# EAGLE board PCBEndCap (EAGLE 8.3.1)
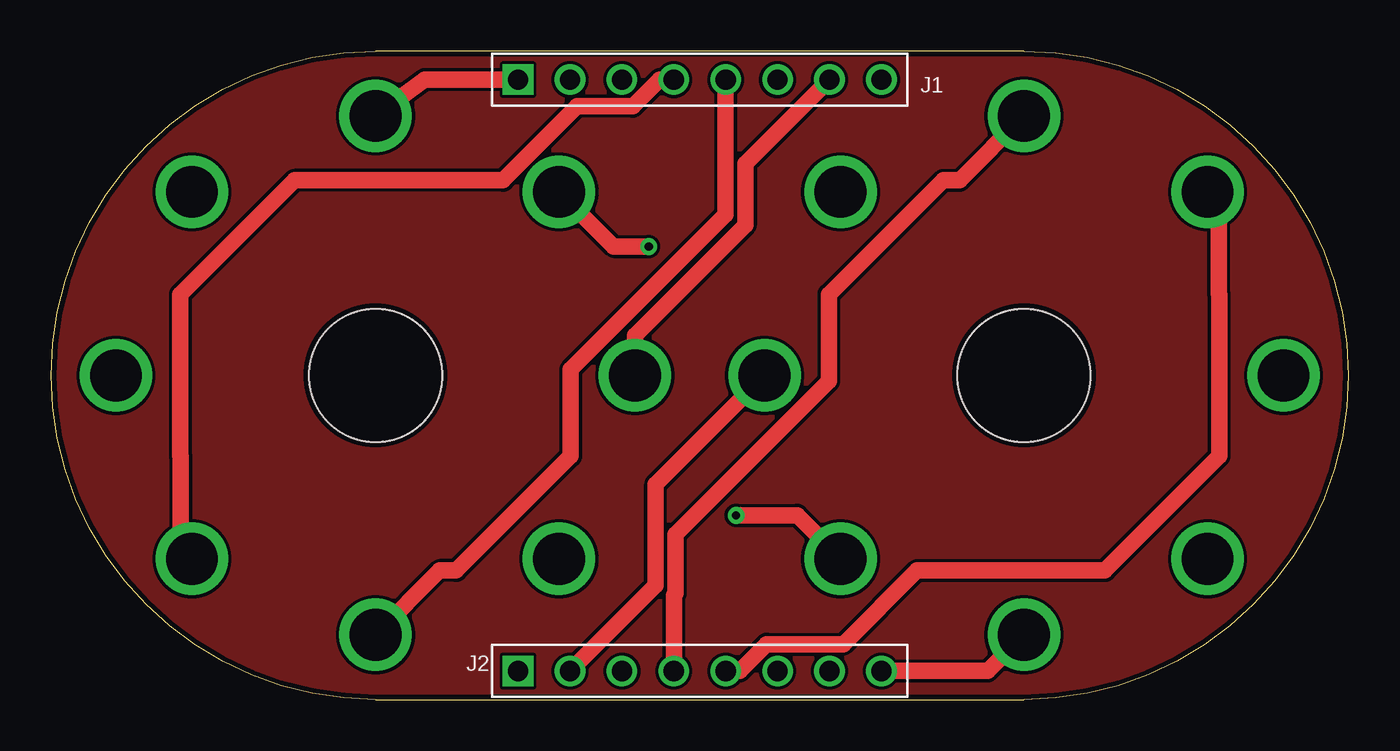
[diagram p0: board, top side]
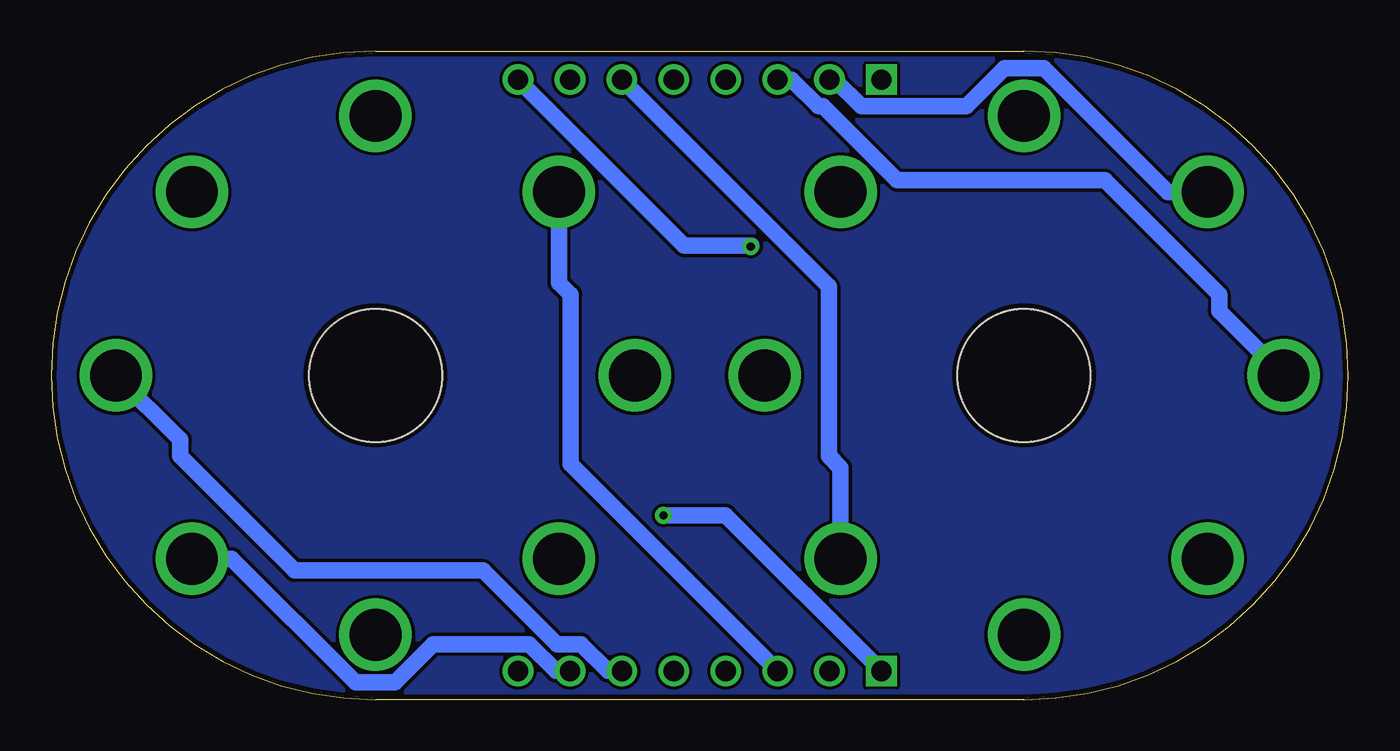
[diagram p1: board, bottom side, seen from below]

Size 63.5 x 31.75 mm. Coordinates in mm from the lower left corner, seen from the top.
Outline: 15.87,0 47.62,0 arc180 47.62,31.75 15.87,31.75 arc180 15.87,0
Copper layers (1*16): Top 0.035mm / dielectric 1.5mm / Bottom 0.035mm
Design rules "default *": minimum track width 6mil, minimum drill 0.35mm, track to track 6mil, track to pad 6mil, pad to pad 6mil, via to via 6mil, smd to smd 6mil, copper to edge 10mil, drill to drill 6mil, minimum pad ring 10mil, minimum via ring 8mil, stop-mask expansion 4mil, vias tented up to drill 0mil, thermal gap 10mil
Holes 6.5 mm at 15.87,15.88 47.62,15.88

## Footprints (pad centres in the part's own frame; a part is rotated, then mirrored left to right if it is on the bottom)
8PIN_.1' = drill 0.991 square: P$1 -8.89,0 | drill 0.991: P$2 -6.35,0; P$3 -3.81,0; P$4 -1.27,0; P$5 1.27,0; P$6 3.81,0; P$7 6.35,0; P$8 8.89,0

## Placement (x,y rotation side)
J1  CONNECTOR_8PIN  [8PIN_.1']  31.75,30.35 0 top
J2  CONNECTOR_8PIN  [8PIN_.1']  31.75,1.4 0 top

## Library data of the parts
J1 J2 = lolomolo

## Nets
N1: J1.P$1
N2: J1.P$2
N3: J1.P$3
N4: J1.P$4
N5: J1.P$5
N6: J1.P$6
N7: J1.P$7
N8: J1.P$8
N9: J2.P$1
N10: J2.P$2
N11: J2.P$3
N12: J2.P$4
N13: J2.P$5
N14: J2.P$6
N15: J2.P$7
N16: J2.P$8

## Tracks (layer width: path | path; a pad name or v marks a point on that pad's centre or on a via)
N1  (via drill 2.54)
  Top 0.813: J1.P$1 18.29,30.35 v15.87,28.57
N2  (via drill 2.54)
  Bottom 0.813: J1.P$2 25.15,30.35 23.84,29.05 18.71,29.05 16.84,30.91 14.91,30.91 8.85,24.86 v6.89,24.86
N3  (via drill 2.54)
  Bottom 0.813: v3.17,15.88 6.32,19.02 6.32,19.83 11.92,25.43 22.1,25.43 25.71,29.05 25.94,29.05 27.25,30.35 J1.P$3
N4  (via drill 2.54)
  Top 0.813: J1.P$4 29.79,30.35 28.48,29.05 25.74,29.05 22.12,25.43 11.92,25.43 6.32,19.83 6.32,11.92 6.35,11.89 6.35,7.44 v6.89,6.89
N5  (via drill 2.54)
  Top 0.813: v15.87,3.17 19.02,6.32 19.83,6.32 25.43,11.92 25.43,16.16 33.02,23.75 J1.P$5
N6  (via drill 2.54)
  Bottom 0.813: v24.85,6.89 24.85,11.35 25.43,11.92 25.43,20.22 J1.P$6
N7  (via drill 2.54)
  Top 0.813: J1.P$7 33.98,26.24 33.98,23.23 28.57,17.82 v28.57,15.88
N8  (via drill 0.41, 2.54)
  Top 0.813: v24.85,24.86 27.53,22.18 v29.26,22.18
  Bottom 0.813: J1.P$8 32.51,22.23 29.21,22.23 v29.26,22.18
N9  (via drill 0.41, 2.54)
  Top 0.813: v33.53,9.02 36.52,9.02 v38.64,6.89
  Bottom 0.813: J2.P$1 30.48,9.02 v33.53,9.02
N10  (via drill 2.54)
  Top 0.813: J2.P$2 29.59,5.59 29.59,10.54 v34.92,15.88
N11  (via drill 2.54)
  Bottom 0.813: v38.64,24.86 38.64,20.4 38.07,19.83 38.07,11.53 J2.P$3
N12  (via drill 2.54)
  Top 0.813: v47.62,28.57 44.48,25.43 43.67,25.43 38.07,19.83 38.07,15.59 30.56,8.08 30.56,5.19 30.48,5.11 J2.P$4
N13  (via drill 2.54)
  Top 0.813: J2.P$5 33.71,1.4 35.02,2.71 38.77,2.71 42.39,6.32 51.58,6.32 57.18,11.92 57.18,19.83 57.15,19.86 57.15,24.31 v56.6,24.86
N14  (via drill 2.54)
  Bottom 0.813: v60.33,15.88 57.18,12.73 57.18,11.92 51.58,6.32 42.35,6.32 38.73,2.71 37.56,2.71 36.25,1.4 J2.P$6
N15  (via drill 2.54)
  Bottom 0.813: J2.P$7 38.79,1.4 40.1,2.71 44.79,2.71 46.66,0.84 48.59,0.84 54.65,6.89 v56.6,6.89
N16  (via drill 2.54)
  Top 0.813: J2.P$8 45.85,1.4 v47.62,3.17
N$1
  pour Bottom: 15.87,0 arc-90 0,15.88 arc-90 15.87,31.75 47.62,31.75 arc-90 63.5,15.88 arc-90 47.62,0
N$4
  pour Top: 15.87,0 arc-90 0,15.88 arc-90 15.87,31.75 47.62,31.75 arc-90 63.5,15.88 arc-90 47.62,0